# EAGLE board Layout (EAGLE 7.7.0)
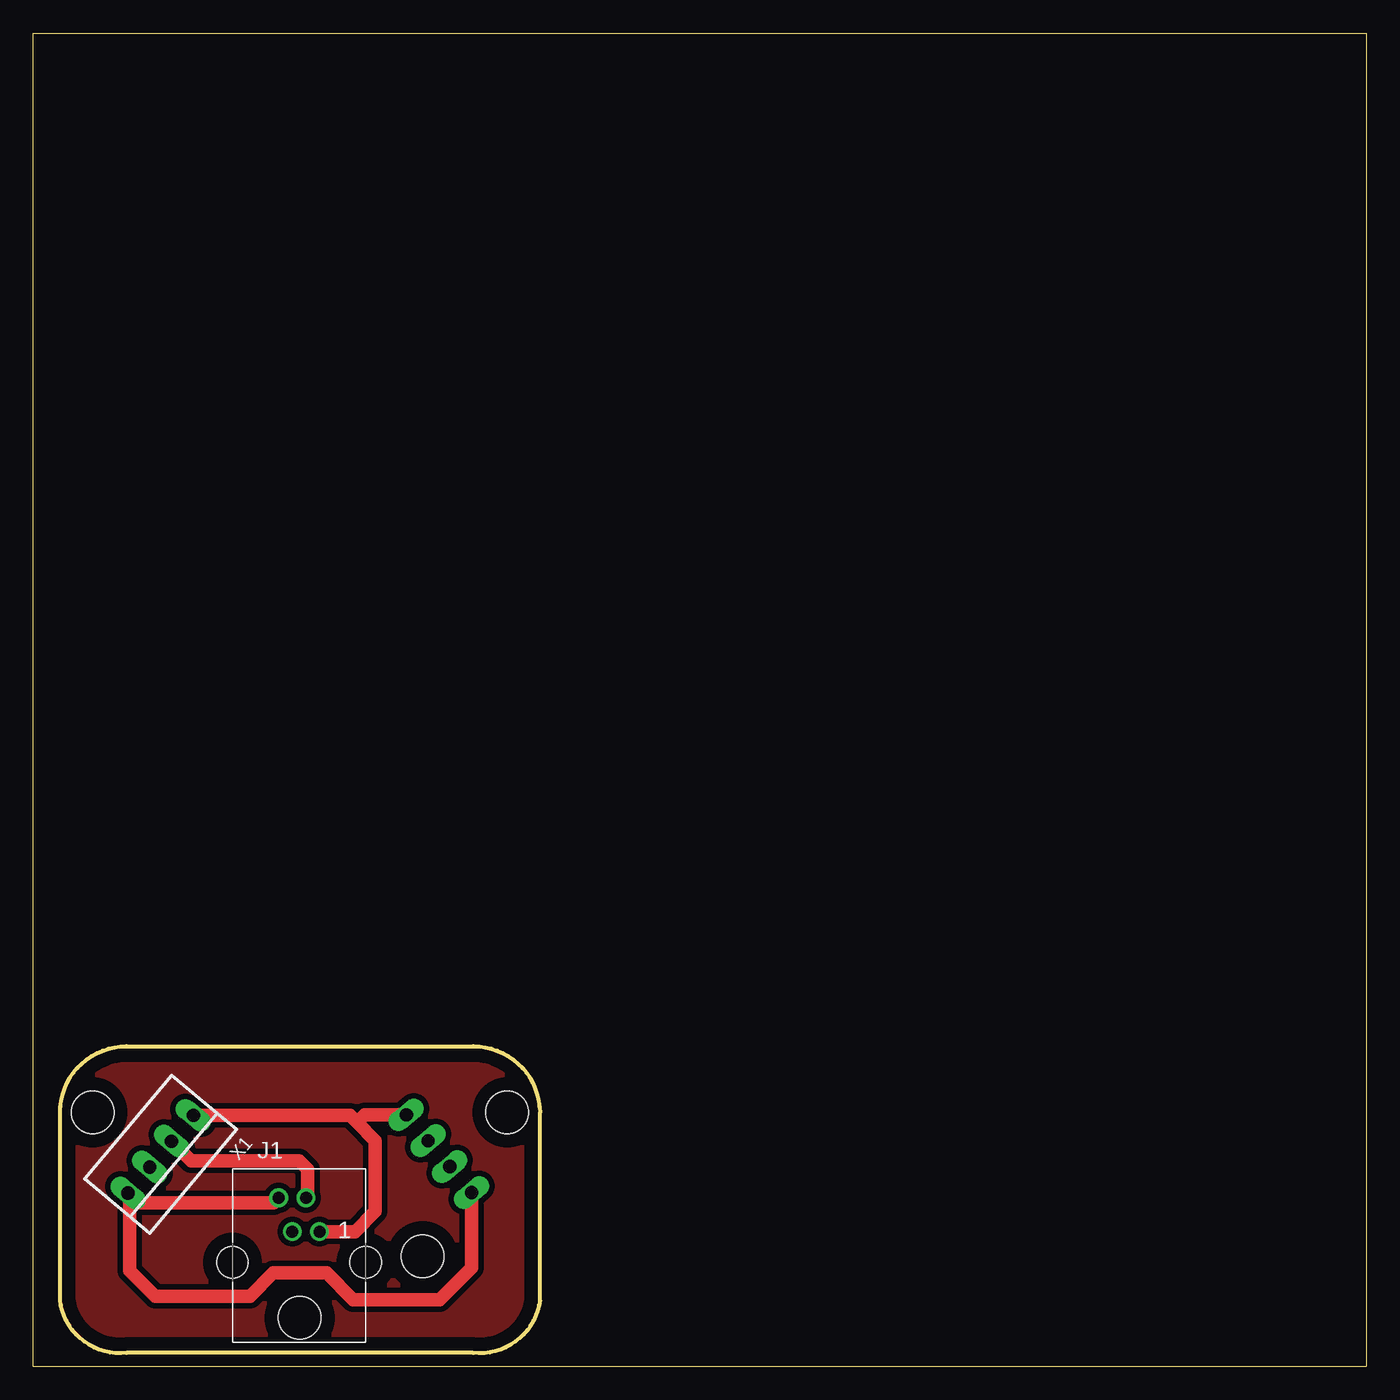
[diagram p0: board, top side]
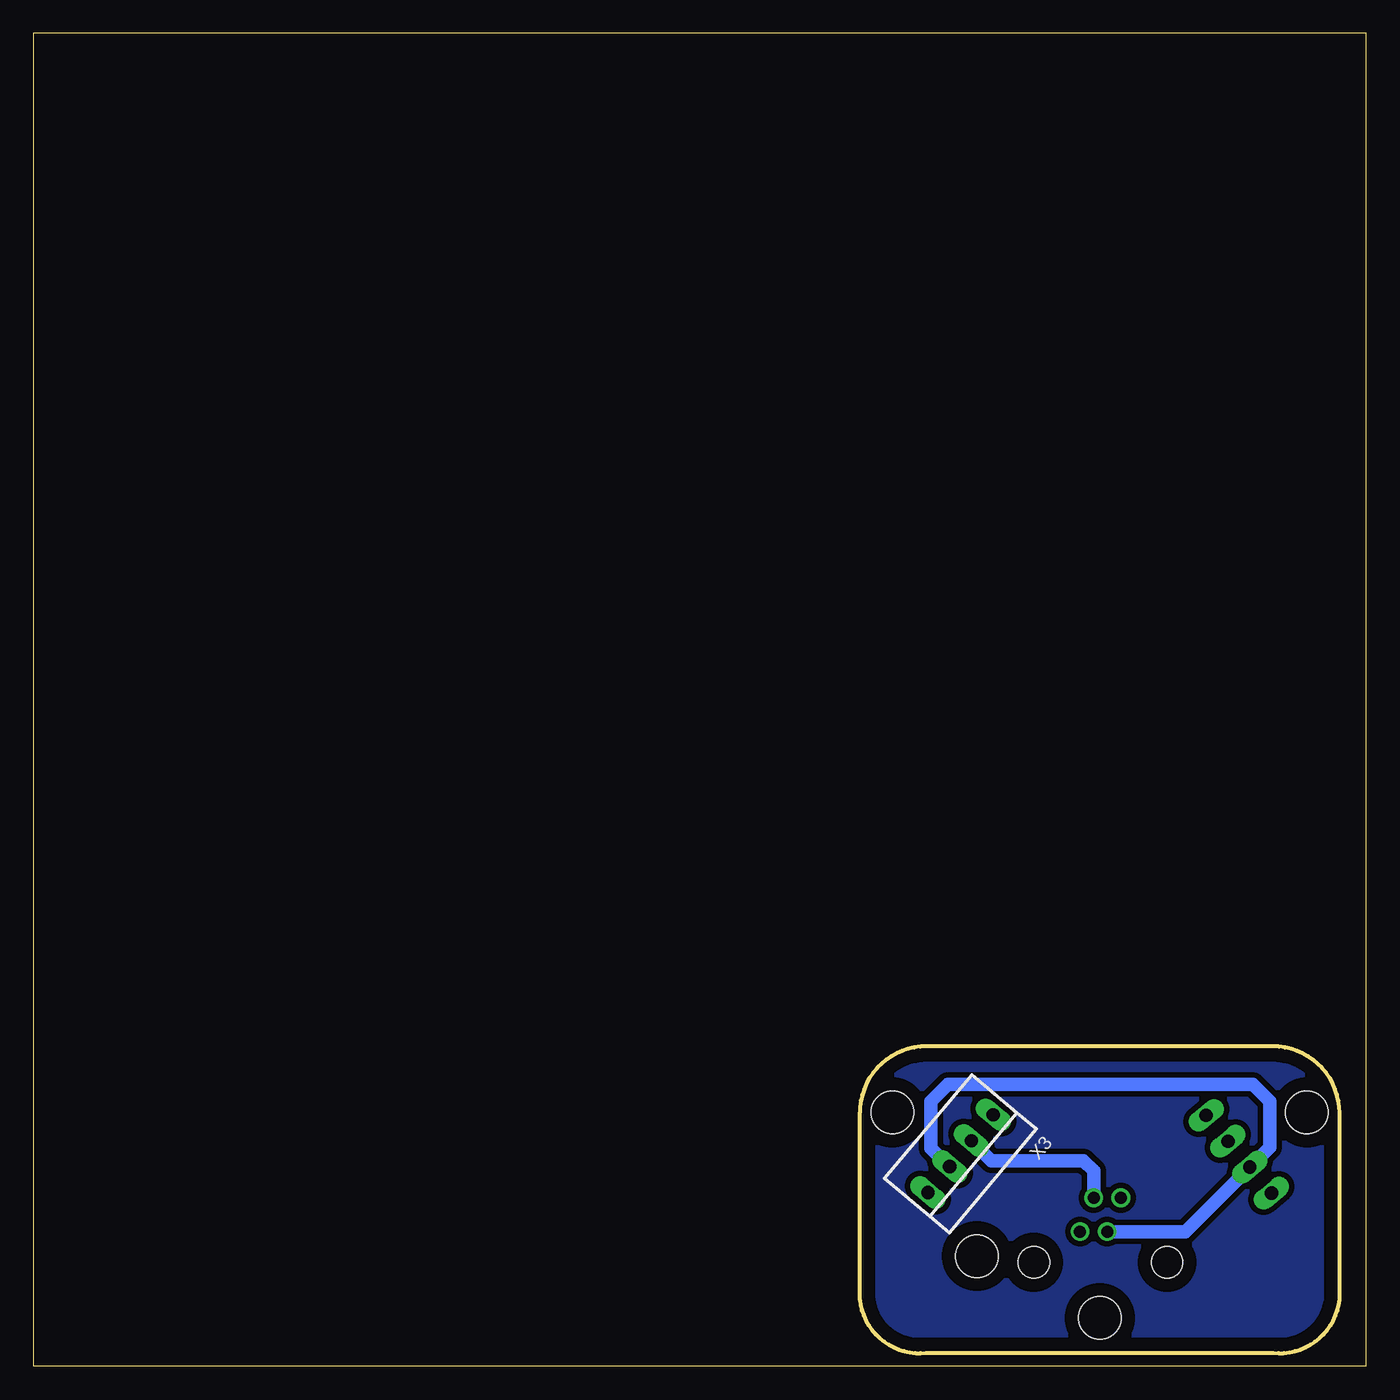
[diagram p1: board, bottom side, seen from below]

Size 100 x 100 mm. Coordinates in mm from the lower left corner, seen from the top.
Outline: 0,0 100,0 100,100 0,100 0,0
Outline: 7,24 33,24 arc-90 38,19 38,5 arc-90 33,1 7,1 arc-90 2,5 2,19 arc-90 7,24
Copper layers (1*16): Top 0.035mm / dielectric 1.5mm / Bottom 0.035mm
Design rules "default": minimum track width 10mil, minimum drill 24mil, track to track 8mil, track to pad 8mil, pad to pad 8mil, via to via 8mil, smd to smd 8mil, copper to edge 40mil, drill to drill 8mil, minimum pad ring 10mil, minimum via ring 8mil, stop-mask expansion 4mil, vias tented up to drill 0mil, thermal gap 10mil
Holes 3.2 mm at 4.45,19.05 29.21,8.26 35.56,19.05 19.98,3.62

## Footprints (pad centres in the part's own frame; a part is rotated, then mirrored left to right if it is on the bottom)
615004143821 = drill 0.9: 1 1.53,2.3; 2 0.51,4.84; 3 -0.51,2.3; 4 -1.53,4.84 | hole 2.36: -5,0; 5,0
22-23-2041 = drill 1 long: 1 -3.81,0; 2 -1.27,0; 3 1.27,0; 4 3.81,0

## Placement (x,y rotation side)
E$1  [25X25_BEST]  8.14,5.25 10 top
J1  [615004143821]  19.94,7.79 0 top
X1  22-23-2041  [22-23-2041]  9.55,15.9 230 top
X3  22-23-2041  [22-23-2041]  30.43,15.94 230 bottom

## Library data of the parts
E$1 = !!!Platinen_Logo!!!
J1 = InputOutputIO (rev18b)
X1 X3 = con-molex; MF: MOLEX; MPN: 22-23-2041; OC_FARNELL: 1462920; OC_NEWARK: 38C0355

## Nets
N$1: J1.1 X1.1 X3.1
N$2: J1.2 X1.2 X3.2
N$3: J1.3 X1.3 X3.3
N$4: J1.4 X1.4 X3.4

## Tracks (layer width: path | path; a pad name or v marks a point on that pad's centre or on a via)
GND
  pour Bottom (isolate 0.406): 33,1 7,1 arc-90 2,5 2,19 arc-90 7,24 33,24 arc-90 38,19 38,5 arc-90
  pour Top (isolate 0.406): 33,1 7,1 arc-90 2,5 2,19 arc-90 7,24 33,24 arc-90 38,19 38,5 arc-90
N$1
  Top 1.016: X1.1 23.75,18.82 24.29,18.29 | J1.1 24.14,10.1 25.66,11.61 25.66,16.91 24.29,18.29 | X3.1 24.86,18.86 24.29,18.29
N$2
  Top 1.016: X1.2 11.83,15.41 19.94,15.41 20.57,14.78 20.57,12.76 J1.2
  Bottom 1.016: X3.2 28.12,15.41 21.21,15.41 20.45,14.65 J1.2
N$3
  Bottom 1.016: J1.3 13.57,10.1 X1.3 7.24,16.43 7.24,19.86 8.51,21.13 31.37,21.13 32.64,19.86 32.64,16.36 X3.3
N$4
  Top 1.016: J1.4 18.02,12.24 7.85,12.24 X1.4 7.24,12.85 7.24,7.16 9.14,5.25 16.25,5.25 18,7 22,7 24,5 30.48,5 32.88,7.4 X3.4